# Altium PCB PCB设计_2022-03-27.pcbdoc
Units mil, origin at the board's own origin, x right, y up, seen from the top; angles counter-clockwise.
Board outline 5750.61 x 5202.19 mil, 2 copper layers (Top Layer, Bottom Layer); 62 components, 52 nets, 226 pads, 87 vias.
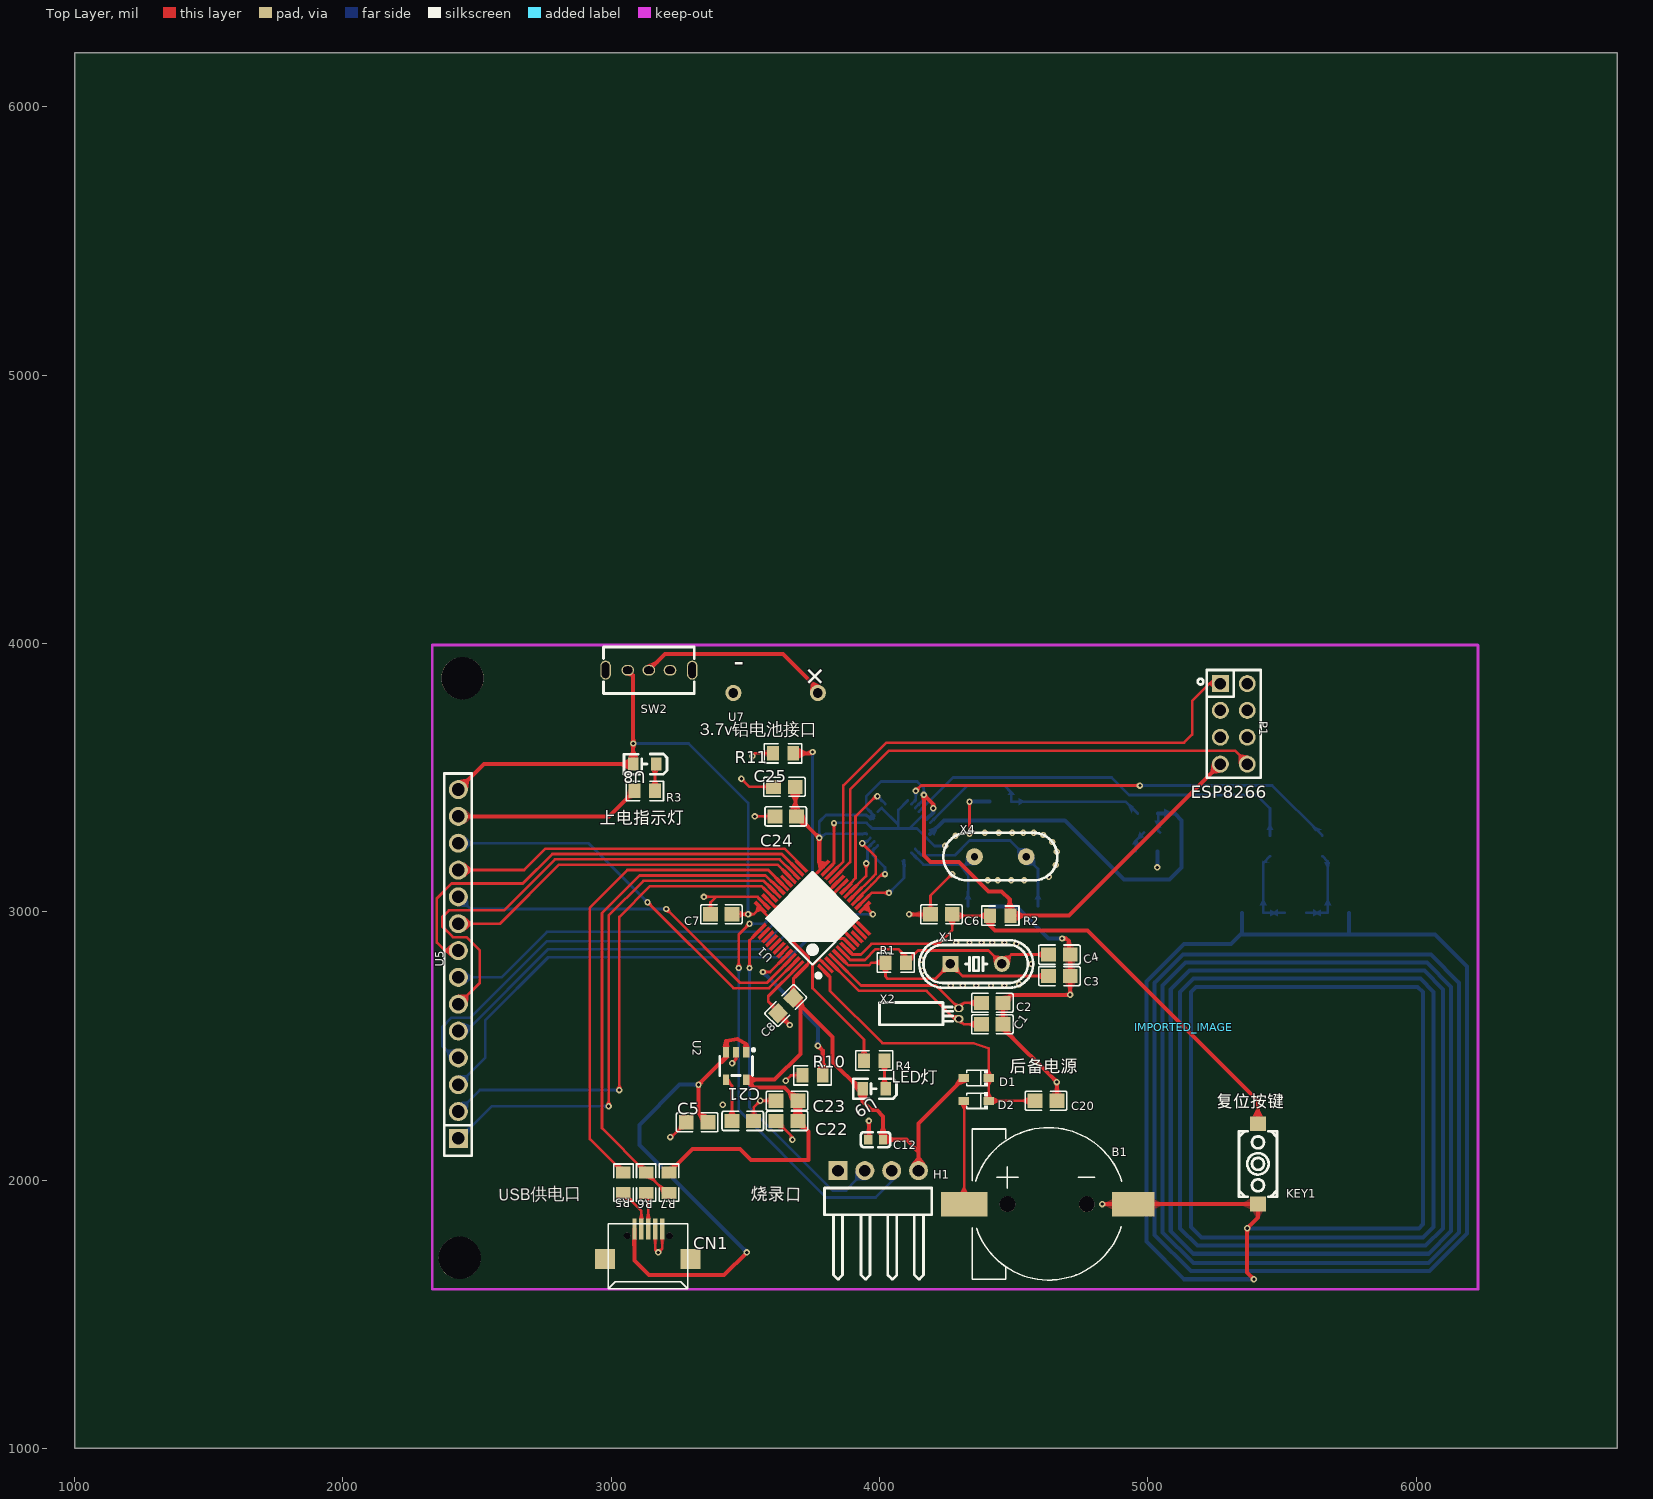
[diagram p0: Top Layer view]
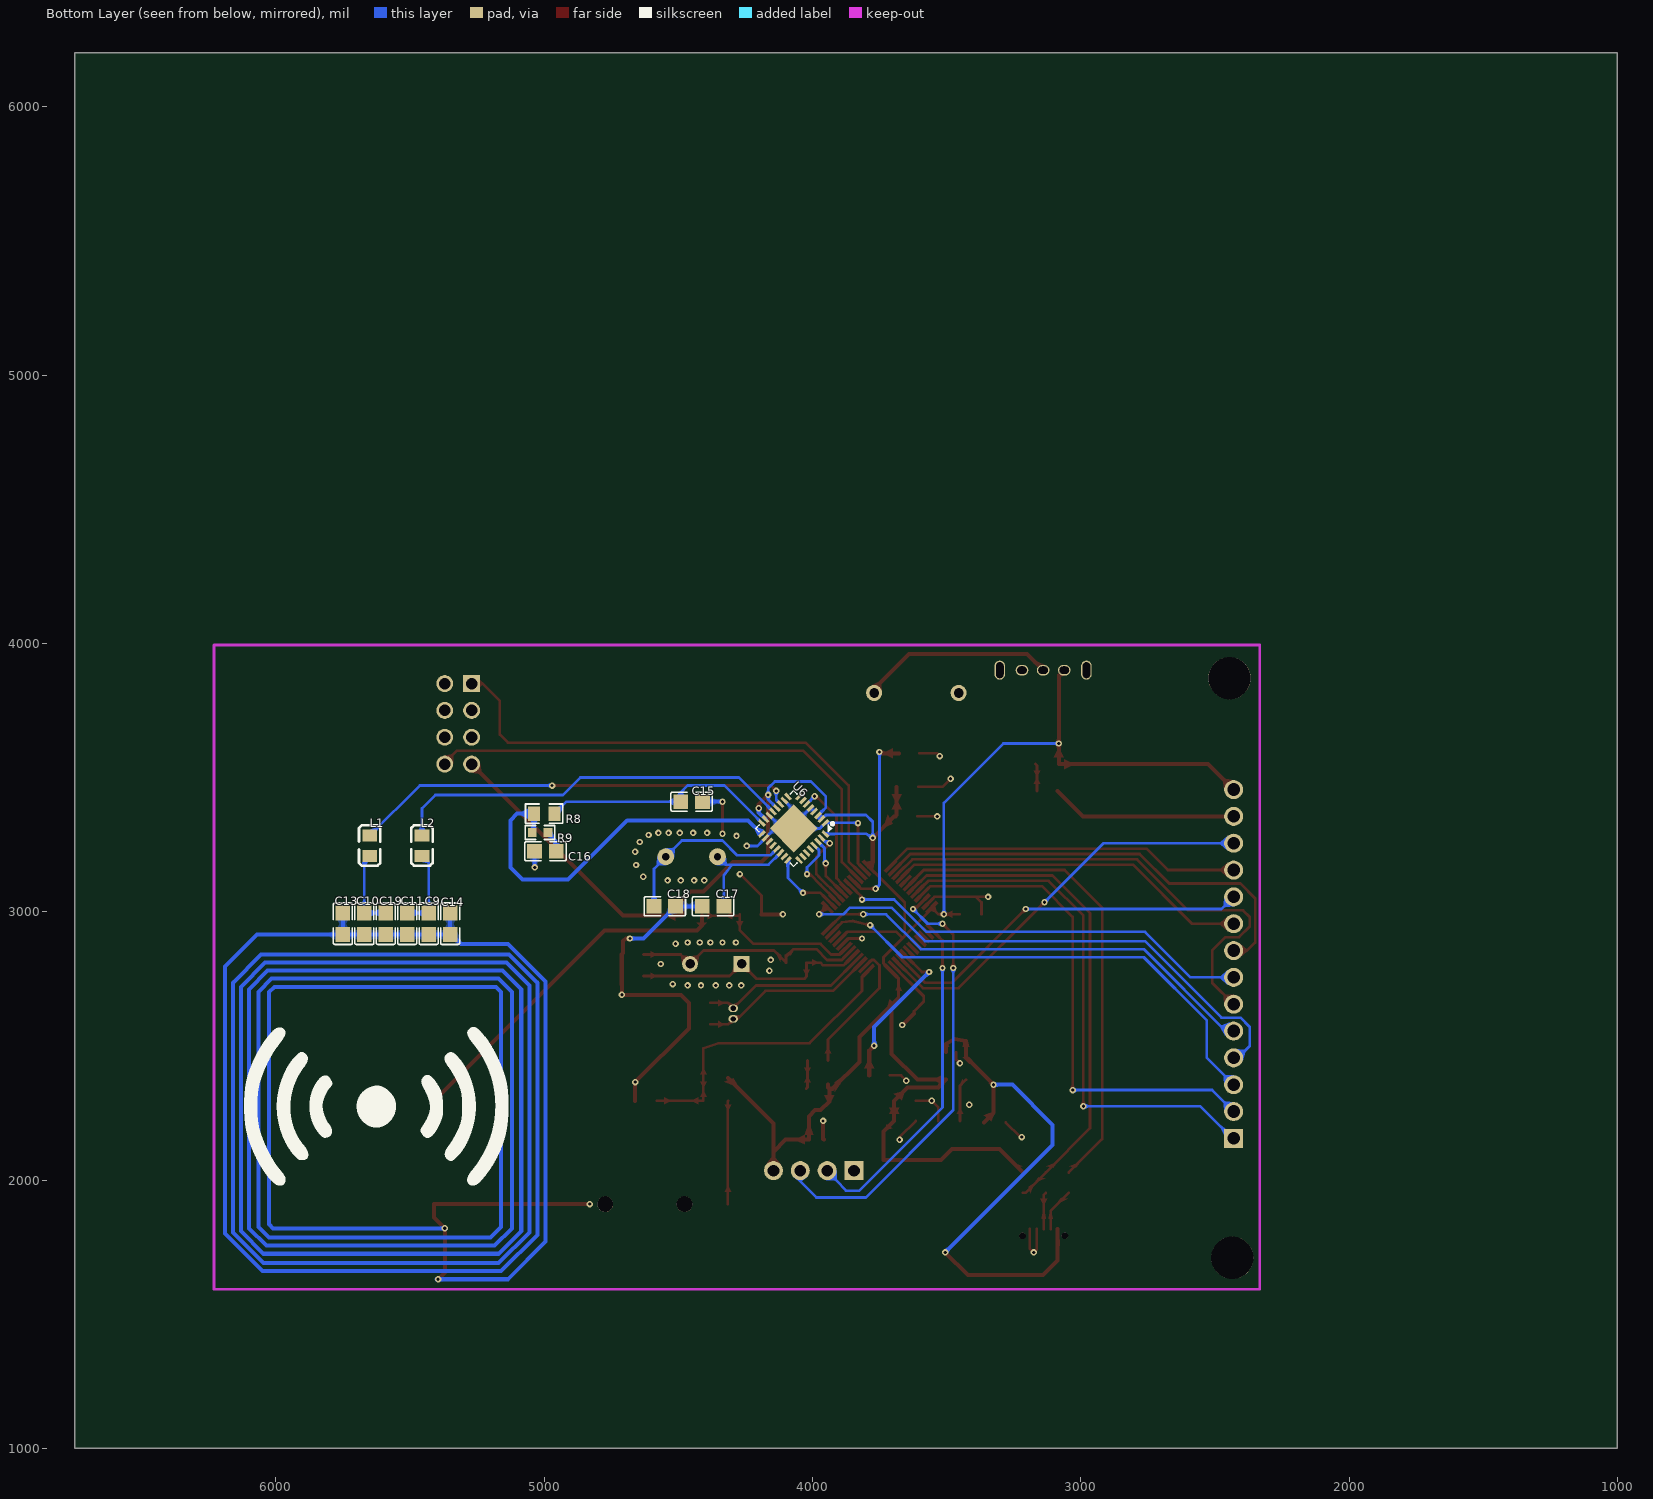
[diagram p1: Bottom Layer view, seen from below]

## Layer stack, top to bottom
Top Layer: signal copper (thickness not stored)
Dielectric: dielectric 12.6, FR-4, Dk 4.8
Bottom Layer: signal copper (thickness not stored)

## Board outline
6750.61,1000 1000,1000 1000,6202.19 6750.61,6202.19

## Components (designator, comment, footprint, x,y, rotation, side; value= is the part's Value field where it differs from the comment)
B1 "CR1220-2" BAT-SMD_CR1220-2 4630.61,1910.19 r0 top
C1 "20pF" C0805#1 4420.61,2580.19 r180 top
C2 "20pF" C0805#1 4420.61,2660.19 r180 top
C3 "20pF" C0805#1 4670.61,2760.19 r180 top
C4 "20pF" C0805#1 4670.61,2840.19 r180 top
C5 "1uF" C0805#1 3320.61,2215.19 r0 top
C6 "1uF" C0805#1 4230.61,2990.19 r0 top
C7 "0.1uF" C0805#1 3410.61,2990.19 r0 top
C8 "0.1uF" C0805#1 3650.61,2650.19 r45 top
C9 "47pF" C0805#2 5430.61,2955.19 r90 bottom
C10 "47pF" C0805#2 5670.61,2955.19 r90 bottom
C11 "47pF" C0805#2 5510.61,2955.19 r270 bottom
C12 "0.1uF" C0603 3985.61,2150.19 r0 top
C13 "120pF" C0805#2 5750.61,2955.19 r90 bottom
C14 "120pF" C0805#2 5350.61,2955.19 r90 bottom
C15 "68nF" C0805#2 4450.61,3410.19 r180 bottom
C16 "68nF" C0805#2 4995.61,3225.19 r0 bottom
C17 "20pF" C0805#2 4370.61,3020.19 r180 bottom
C18 "20pF" C0805#2 4550.61,3020.19 r0 bottom
C19 "47pF" C0805#2 5590.61,2955.19 r270 bottom
C20 "0.1uF" C0805#1 4620.61,2295.19 r180 top
C21 "1uF" C0805#1 3490.61,2220.19 r180 top
C22 "1uF" C0805#1 3655.61,2220.19 r0 top
C23 "1uF" C0805#1 3655.61,2295.19 r0 top
C24 "0.1uF" C0805#1 3650.61,3355.19 r0 top
C25 "0.1uF" C0805#1 3645.61,3465.19 r0 top
CN1 "USB-MK5P(MICRO)" "MICROUSB插座 MK5P 麦克5P MINIUSB MICRO USB母座" 3285.61,1595.19 r0 top
D1 "1N4148WS-C57759" SOD-323_L1.8-W1.3-LS2.5-RD 4360.61,2380.19 r180 top
D2 "1N4148WS-C57759" SOD-323_L1.8-W1.3-LS2.5-RD 4360.61,2295.19 r180 top
H1 "KH-2.54PH90-1X4P-L13.8" HDR-TH_4P-P2.54-H-M-W10.4-N 3995.61,2035.19 r0 top
IMPORTED_IMAGE "IMPORTED_IMAGE" IMPORTED_IMAGE 5133.62,2570.11 r0 top
KEY1 "K2-3.6×6.1_SMD" KEY-SMD_2P-L6.2-W3.6-LS8.0 5410.61,2060.19 r90 top
L1 "2.2uH" L0805 5650.61,3245.19 r90 bottom
L2 "2.2uH" L0805 5455.61,3245.19 r90 bottom
P1 "ESP8266-TH8" HDR-TH_8P-P2.54-V-F-R2-C4-S2.54-1 5320.61,3700.19 r270 top
R1 "1MΩ" R0805#1 4060.61,2810.19 r180 top
R2 "10kΩ" R0805#1 4450.61,2985.19 r0 top
R3 "510Ω" R0805#1 3125.61,3450.19 r0 top
R4 "510Ω" R0805#1 3980.61,2445.19 r0 top
R5 "30Ω" R0805#1 3045.61,1990.19 r270 top
R6 "30Ω" R0805#1 3130.61,1990.19 r270 top
R7 "4.3K" R0805#1 3215.61,1990.19 r270 top
R8 "820Ω" R0805#2 5000.61,3365.19 r180 bottom
R9 "560" R0603 5015.61,3295.19 r0 bottom
R10 "10kΩ" R0805#1 3750.61,2390.19 r0 top
R11 "10kΩ" R0805#1 3640.61,3590.19 r180 top
SW2 "SK-12D02-VG5" SW-TH_SK-12D02VG3 3140.61,3900.19 r180 top
U1 "STM32F103C8T6" LQFP48(STM32F103X8/STM32F103XB) 3750.61,2975.19 r135 top
U2 "RT9193-30GB" SOT-23-5_L3.0-W1.7-P0.95-LS2.8-BR 3465.61,2425.19 r90 top
U5 "KH-2.54FH-1X14P-H8.5" HDR-TH_14P-P2.54-V-F 2430.61,2805.19 r90 top
U6 "MFRC522" QFN-32_L5.0-W5.0-P0.50-TL-EP3.1 4070.61,3310.19 r135 bottom
U7 "3.7v锂电池接口" 3.7V锂电池接口 3770.61,3815.19 r90 top
U8 "发光二极管（黄绿色）" LED0805-RD 3125.61,3550.19 r180 top
U9 "发光二极管（黄绿色）" LED0805-RD 3980.61,2340.19 r180 top
X1 "8MHz" HC-49US_L11.5-W4.5-P4.88 4360.61,2805.19 r0 top
X2 "32.768KHz" OSC-TH_BD2.1-P0.70-D0.3 4295.61,2620.19 r0 top
X4 "27.12MHz" OSC-TH_L10.0-W4.5-P5.00 4450.61,3205.19 r90 top
? "" ? 4283.11,4136.04 r0 top
? "" ? 5086.42,4497.69 r0 top
? "" ? 2247.2,1850.2 r0 top
? "" ? 2183.81,3742.7 r0 top
? "" ? 1916.31,2800.19 r0 top

## Footprints (in the part's own frame and the unit in brackets; to place one, negate y for a bottom-side part, rotate by r counter-clockwise, add the part's x,y. Pads: shape width x height; smd on the part's side, far side on the other; paste and mask are expansions set on the pad)
3.7V锂电池接口 [mil]
  round 60 hole 36: 1(0,0) 2(0,314.96)
BAT-SMD_CR1220-2 [mm]
  rect 4.4x2.3 smd: 1(-8,0)
  rect 4x2.3 smd: 2(8,0)
  round 1.5 hole 1.5 unplated: ""(-3.9,0) ""(3.6,0)
  silkscreen extent -7.22,-7.19 6.92,7.25
C0603 [mm]
  rect 0.8x0.9 smd: 1(-0.7,0) 2(0.7,0)
  silkscreen extent -1.41,-0.71 1.39,0.72
C0805#1 [mm]
  rect 1.41x1.35 smd: 1(-1.03,0) 2(1.03,0)
  silkscreen extent -1.96,-0.9 1.96,0.9
C0805#2 [mm]
  rect 1.41x1.35 smd: 1(1.03,0) 2(-1.03,0)
  silkscreen extent -1.96,-0.9 1.96,0.9
HC-49US_L11.5-W4.5-P4.88 [mm]
  rect 1.5x1.5 hole 0.9: 1(-2.44,0)
  round 1.5 hole 0.9: 2(2.44,0)
  silkscreen extent -5.39,-2.25 5.39,2.25
HDR-TH_4P-P2.54-H-M-W10.4-N [mm]
  rect 1.8x1.8 hole 1.1: 1(-3.81,0)
  round 1.8 hole 1.1: 2(-1.27,0) 3(1.27,0) 4(3.81,0)
  silkscreen extent -5.09,-10.27 5.07,-1.65
HDR-TH_8P-P2.54-V-F-R2-C4-S2.54-1 [mm]
  rect 1.6x1.6 hole 1.1: 1(-3.81,-1.27)
  round 1.6 hole 1.1: 2(-3.81,1.27) 3(-1.27,-1.27) 4(-1.27,1.27) 5(1.27,-1.27) 6(1.27,1.27) 7(3.81,-1.27) 8(3.81,1.27)
  silkscreen extent -5.1,-3.42 5.1,2.55
HDR-TH_14P-P2.54-V-F [mm]
  rect 1.8x1.8 hole 1.2: 1(-16.51,0)
  round 1.8 hole 1.2: 2(-13.97,0) 3(-11.43,0) 4(-8.89,0) 5(-6.35,0) 6(-3.81,0) 7(-1.27,0) 8(1.27,0) 9(3.81,0) 10(6.35,0) 11(8.89,0) 12(11.43,0) 13(13.97,0) 14(16.51,0)
  silkscreen extent -18.16,-1.27 18.03,1.34
IMPORTED_IMAGE [mil]
KEY-SMD_2P-L6.2-W3.6-LS8.0 [mm]
  rect 1.4x1.5 smd: 1(-3.8,0) 2(3.8,0)
  silkscreen extent -3.1,-1.8 3.1,1.8
L0805 [mil]
  rect 44.59x54.21 smd: 1(38.05,0) 2(-38.04,0)
  silkscreen extent -73,-40 77,40
LED0805-RD [mm]
  rect 1x1.25 smd: 1(-1.1,0) 2(1.1,0)
  silkscreen extent -2.1,-0.95 1.98,0.96
LQFP48(STM32F103X8/STM32F103XB) [mil]
  round 0 smd: 1(-166.34,108.27) 2(-166.34,88.58) 3(-166.34,68.9) 4(-166.34,49.21) 5(-166.34,29.53) 6(-166.34,9.84) 7(-166.34,-9.84) 8(-166.34,-29.53) 9(-166.34,-49.21) 10(-166.34,-68.9) 11(-166.34,-88.58) 12(-166.34,-108.27) 13(-108.27,-166.34) 14(-88.58,-166.34) 15(-68.9,-166.34) 16(-49.21,-166.34) 17(-29.53,-166.34) 18(-9.84,-166.34) 19(9.84,-166.34) 20(29.53,-166.34) 21(49.21,-166.34) 22(68.9,-166.34) 23(88.58,-166.34) 24(108.27,-166.34) 25(166.34,-108.27) 26(166.34,-88.58) 27(166.34,-68.9) 28(166.34,-49.21) 29(166.34,-29.53) 30(166.34,-9.84) 31(166.34,9.84) 32(166.34,29.53) 33(166.34,49.21) 34(166.34,68.9) 35(166.34,88.58) 36(166.34,108.27) 37(108.27,166.34) 38(88.58,166.34) 39(68.9,166.34) 40(49.21,166.34) 41(29.53,166.34) 42(9.84,166.34) 43(-9.84,166.34) 44(-29.53,166.34) 45(-49.21,166.34) 46(-68.9,166.34) 47(-88.58,166.34) 48(-108.27,166.34)
  Top Layer region: -114.17,194.88 -102.36,194.88 -102.36,137.8 -114.17,137.79
  Top Layer region: -94.49,194.88 -82.68,194.88 -82.68,137.79 -94.49,137.8
  Top Layer region: -74.8,194.88 -62.99,194.88 -62.99,137.8 -74.8,137.79
  Top Layer region: -55.12,194.88 -43.31,194.88 -43.31,137.79 -55.12,137.79
  Top Layer region: -35.43,194.88 -23.62,194.88 -23.62,137.8 -35.43,137.8
  Top Layer region: -15.75,194.88 -3.94,194.88 -3.94,137.8 -15.75,137.79
  Top Layer region: 3.94,194.88 15.75,194.88 15.75,137.79 3.94,137.8
  Top Layer region: 23.62,194.88 35.43,194.88 35.43,137.8 23.62,137.8
  Top Layer region: 43.31,194.88 55.12,194.88 55.12,137.79 43.31,137.79
  Top Layer region: 62.99,194.88 74.8,194.88 74.8,137.79 62.99,137.8
  Top Layer region: 82.68,194.88 94.49,194.88 94.49,137.8 82.68,137.79
  Top Layer region: 102.36,194.88 114.17,194.88 114.17,137.79 102.36,137.8
  Top Layer region: 137.8,102.36 137.79,114.17 194.88,114.17 194.88,102.36
  Top Layer region: 137.79,82.68 137.8,94.49 194.88,94.49 194.88,82.68
  Top Layer region: 137.8,62.99 137.79,74.8 194.88,74.8 194.88,62.99
  Top Layer region: 137.79,43.31 137.79,55.12 194.88,55.12 194.88,43.31
  Top Layer region: 137.8,23.62 137.8,35.43 194.88,35.43 194.88,23.62
  Top Layer region: 137.8,3.94 137.79,15.75 194.88,15.75 194.88,3.94
  Top Layer region: 137.79,-15.75 137.8,-3.94 194.88,-3.94 194.88,-15.75
  Top Layer region: 137.8,-35.43 137.8,-23.62 194.88,-23.62 194.88,-35.43
  Top Layer region: 137.79,-55.12 137.79,-43.31 194.88,-43.31 194.88,-55.12
  Top Layer region: 137.79,-74.8 137.8,-62.99 194.88,-62.99 194.88,-74.8
  Top Layer region: 137.8,-94.49 137.79,-82.68 194.88,-82.68 194.88,-94.49
  Top Layer region: 137.79,-114.17 137.8,-102.36 194.88,-102.36 194.88,-114.17
  Top Layer region: 102.36,-137.8 114.17,-137.79 114.17,-194.88 102.36,-194.88
  Top Layer region: 82.68,-137.79 94.49,-137.8 94.49,-194.88 82.68,-194.88
  Top Layer region: 62.99,-137.8 74.8,-137.79 74.8,-194.88 62.99,-194.88
  Top Layer region: 43.31,-137.79 55.12,-137.79 55.12,-194.88 43.31,-194.88
  Top Layer region: 23.62,-137.8 35.43,-137.8 35.43,-194.88 23.62,-194.88
  Top Layer region: 3.94,-137.8 15.75,-137.79 15.75,-194.88 3.94,-194.88
  Top Layer region: -15.75,-137.79 -3.94,-137.8 -3.94,-194.88 -15.75,-194.88
  Top Layer region: -35.43,-137.8 -23.62,-137.8 -23.62,-194.88 -35.43,-194.88
  Top Layer region: -55.12,-137.79 -43.31,-137.79 -43.31,-194.88 -55.12,-194.88
  Top Layer region: -74.8,-137.79 -62.99,-137.8 -62.99,-194.88 -74.8,-194.88
  Top Layer region: -94.49,-137.8 -82.68,-137.79 -82.68,-194.88 -94.49,-194.88
  Top Layer region: -114.17,-137.79 -102.36,-137.8 -102.36,-194.88 -114.17,-194.88
  Top Layer region: -194.88,-114.17 -194.88,-102.36 -137.8,-102.36 -137.79,-114.17
  Top Layer region: -194.88,-94.49 -194.88,-82.68 -137.79,-82.68 -137.8,-94.49
  Top Layer region: -194.88,-74.8 -194.88,-62.99 -137.8,-62.99 -137.79,-74.8
  Top Layer region: -194.88,-55.12 -194.88,-43.31 -137.79,-43.31 -137.79,-55.12
  Top Layer region: -194.88,-35.43 -194.88,-23.62 -137.8,-23.62 -137.8,-35.43
  Top Layer region: -194.88,-15.75 -194.88,-3.94 -137.8,-3.94 -137.79,-15.75
  Top Layer region: -194.88,3.94 -194.88,15.75 -137.79,15.75 -137.8,3.94
  Top Layer region: -194.88,23.62 -194.88,35.43 -137.8,35.43 -137.8,23.62
  Top Layer region: -194.88,43.31 -194.88,55.12 -137.79,55.12 -137.79,43.31
  Top Layer region: -194.88,62.99 -194.88,74.8 -137.79,74.8 -137.8,62.99
  Top Layer region: -194.88,82.68 -194.88,94.49 -137.8,94.49 -137.79,82.68
  Top Layer region: -194.88,102.36 -194.88,114.17 -137.79,114.17 -137.8,102.36
  silkscreen extent -171,-122 122,141
"MICROUSB插座 MK5P 麦克5P MINIUSB MICRO USB母座" [mm]
  rect 1.9x1.9 smd: 0(-7.849,2.819) 0(0.254,2.819)
  round 0.6 hole 0.6 slot 0.605 at 45 deg: 0(-5.74,5.004) 0(-1.727,5.004)
  rect 0.4x2 smd: 1(-5.055,5.639) 2(-4.394,5.639) 3(-3.734,5.639) 4(-3.073,5.639) 5(-2.413,5.639)
  silkscreen extent -7.54,0 0,6.15
OSC-TH_BD2.1-P0.70-D0.3 [mm]
  oval 0.9x0.7 hole 0.5: 1(0,0.5) 2(0,-0.5)
  silkscreen extent -7.5,-1.05 -0.57,1.05
OSC-TH_L10.0-W4.5-P5.00 [mm]
  round 1.6 hole 0.7: 1(0,2.45) 2(0,-2.45)
  silkscreen extent -2.25,-5.39 2.25,5.39
QFN-32_L5.0-W5.0-P0.50-TL-EP3.1 [mm]
  rect 0.8x0.3 smd: 1(2.5,-1.75) 2(2.5,-1.25) 3(2.5,-0.75) 4(2.5,-0.25) 5(2.5,0.25) 6(2.5,0.75) 7(2.5,1.25) 8(2.5,1.75) 17(-2.5,1.75) 18(-2.5,1.25) 19(-2.5,0.75) 20(-2.5,0.25) 21(-2.5,-0.25) 22(-2.5,-0.75) 23(-2.5,-1.25) 24(-2.5,-1.75)
  rect 0.3x0.8 smd: 9(1.75,2.5) 10(1.25,2.5) 11(0.75,2.5) 12(0.25,2.5) 13(-0.25,2.5) 14(-0.75,2.5) 15(-1.25,2.5) 16(-1.75,2.5) 25(-1.75,-2.5) 26(-1.25,-2.5) 27(-0.75,-2.5) 28(-0.25,-2.5) 29(0.25,-2.5) 30(0.75,-2.5) 31(1.25,-2.5) 32(1.75,-2.5)
  rect 3.2x3.2 smd: 33(0,0)
  silkscreen extent -2.54,-2.54 3.05,2.54
R0603 [mil]
  rect 31.75x34.02 smd: 1(29.65,0) 2(-29.65,0)
  silkscreen extent -55,-26 55,26
R0805#1 [mil]
  rect 44.59x54.21 smd: 1(-38.04,0) 2(38.04,0)
  silkscreen extent -69,-36 69,36
R0805#2 [mil]
  rect 44.59x54.21 smd: 1(38.04,0) 2(-38.04,0)
  silkscreen extent -69,-36 69,36
SOD-323_L1.8-W1.3-LS2.5-RD [mm]
  rect 1x0.75 smd: 1(-1.173,0) 2(1.173,0)
  silkscreen extent -1.08,-0.8 0.9,0.8
SOT-23-5_L3.0-W1.7-P0.95-LS2.8-BR [mm]
  rect 1x0.6 smd: 1(1.3,-0.95) 2(1.3,0) 3(1.3,0.95) 4(-1.3,0.95) 5(-1.3,-0.95)
  silkscreen extent -0.9,-1.78 1.65,1.55
SW-TH_SK-12D02VG3 [mm]
  oval 1.2x1 hole 0.7 slot 0.9 at 0 deg: 1(-2,0) 2(0,0) 3(2,0)
  oval 1x1.8 hole 0.7 slot 1.5 at 90 deg: 4(4.1,0) 5(-4.1,0)
  silkscreen extent -4.3,-2.2 4.3,2.2
? [mil]

## Free pads (board coordinates)
  round 157.48 hole 157.48: 1(2445.61,3870.19) 2(2435.61,1710.19)

## Via types
v1: diameter 24, hole 12, Top Layer to Bottom Layer, 87 vias

## Nets (pads, with @x,y where several pads share a name; then routed paths per layer and width w, separated by ;. In a path a pad name is that pad's centre, name@x,y a point inside that pad or via, vN(x,y) a via of type N, cw(c..) or ccw(c..) an arc to the next point about the centre after c; other vN are vias at no path point)
+5V: C5.2 CN1.1 U2.1 U2.3 | length 1988.4
  Top Layer w15: CN1.1 3086.61,1699.19 3140.61,1645.19 3420.61,1645.19 v1(3505.61,1730.19) ; C5.2@3361.11,2215.19 3325.61,2250.69 v1(3325.61,2355.19) 3428.21,2457.79 U2.3 3428.21,2517.79 3470.61,2525.19 3503.01,2507.79 U2.1
  Bottom Layer w15: v1(3325.61,2355.19) 3255.61,2355.19 3105.61,2205.19 3105.61,2130.19 v1(3505.61,1730.19)
B1_1: B1.1 D2.2 | length 385.5
  Top Layer w10: D2.2 4315.61,2293.99 B1.1@4315.61,1910.19
C9_1: C9.1 C11.2 L2.2 | length 301.9
  Bottom Layer w10: L2.2 5430.61,3182.19 C9.1 C11.2@5510.61,2995.79
C16_2: C16.2 R9.2 | length 82.8
  Bottom Layer w10: C16.2@4955.01,3225.19 4955.01,3264.29 R9.2@4985.91,3295.19
C19_2: C10.1 C19.2 L1.2 | length 299.8
  Bottom Layer w10: C19.2@5590.61,2995.79 C10.1 5670.61,3187.19 L1.2
GND: B1.2 C1.1 C2.1 C3.1 C4.1 C5.1 C6.1 C7.1 C8.1 C9.2 C10.2 C11.1 C12.1 C13.1 C13.2 C14.1 C14.2 C15.1 C16.1 C17.2 C18.2 C19.1 C20.1 C21.1 C22.1 C23.1 C24.1 C25.1 CN1.4 CN1.5 H1.1 KEY1.1 P1.2 R3.1 R10.1 R11.2 U1.8 U1.23 U1.35 U1.47 U2.2 U5.13 U6.1 U6.4 U6.5 U6.10 U6.14 U6.18 U6.33 U7.2 | length 30456.9
  Top Layer w10: CN1.4 3164.61,1741.19 v1(3175.61,1730.19) 3190.61,1745.19 CN1.5 ; v1(3220.61,2160.19) 3225.11,2160.19 C5.1 ; v1(3345.61,3055.19) 3390.61,3055.19 ; C7.1 3370.11,3034.69 3390.61,3055.19 ; v1(3450.61,2435.19) 3465.61,2450.19 U2.2 ; v1(3485.61,3495.19) 3515.61,3465.19 C25.1@3605.01,3465.19 ; v1(3525.61,3580.19) 3535.61,3590.19 R11.2 ; C21.1@3531.11,2220.19 3531.11,2270.69 v1(3555.61,2295.19) C23.1@3615.01,2295.19 ; v1(3535.61,3355.19) C24.1@3610.01,3355.19 ; U1.35 3545.31,3055.19 3390.61,3055.19 ; C22.1@3615.01,2220.19 3675.61,2159.69 v1(3675.61,2150.19) ; C8.1 3621.91,2628.89 3585.61,2665.19 3585.61,2684.89 U1.47 ; v1(3650.61,2370.19) 3670.61,2390.19 R10.1 ; 3805.61,3155.49 3830.61,3180.49 v1(3830.61,3330.19) ; v1(3815.61,2900.19) 3867.41,2900.19 U1.8 ; C6.1@4190.01,2990.19 4190.01,3059.69 v1(4270.61,3140.19) ; v1(4335.61,3290.19) v1(4335.61,3410.19)
  Top Layer w15: U5.13 2992.61,3355.19 R3.1 ; C8.1 v1(3665.61,2577.85) v1@3665.61,2575.19 ; C12.1@3958.01,2150.19 3960.61,2152.79 v1(3960.61,2220.19) ; v1(4110.61,2990.19) C6.1 ; C1.1@4461.11,2580.19 4461.11,2660.19 4491.11,2690.19 v1(4710.61,2690.19) 4711.11,2760.19 4711.11,2840.19 4705.61,2845.69 4705.61,2890.19 4695.61,2900.19 v1(4680.61,2900.19) ; C1.1 4461.21,2565.19 v1(4661.16,2365.19) C20.1 ; v1(4830.61,1910.19) B1.2 KEY1.1 5410.61,1860.19 v1(5370.61,1820.19) 5370.61,1655.19 v1(5395.61,1630.19)
  Bottom Layer w10: v1(3830.61,3330.19) 3831.51,3331.09 U6.1 3973.21,3310.19 U6.33 ; U6.4@3994.01,3372.79 4008.01,3386.79 4070.61,3324.09 U6.33 ; U6.10 4070.61,3379.79 U6.33 ; U6.14 4112.41,3310.19 U6.33 ; v1(4245.61,3245.19) 4205.21,3245.19 U6.18 4140.21,3310.19 U6.33
  Bottom Layer w15: v1(4335.61,3410.19) C15.1 ; C17.2 4510.01,3020.19 4630.01,2900.19 v1(4680.61,2900.19) ; v1(5035.61,3165.19) C16.1@5036.11,3225.19 ; C14.2@5350.61,2914.69 5345.01,2914.69 5310.61,2880.19 5135.61,2880.19 4995.61,2740.19 4995.61,1770.19 5135.61,1630.19 v1(5395.61,1630.19) v1@5400.61,1630.19 ; C14.1 C14.2 C9.2 5510.61,2914.69 5590.61,2914.69 C10.2 C13.2 C13.1 ; v1@5365.61,1820.19 v1(5370.61,1820.19) 6010.61,1820.19 6025.61,1835.19 6025.61,2700.19 6005.61,2720.19 5180.61,2720.19 5160.61,2700.19 5160.61,1825.19 5200.61,1785.19 6025.61,1785.19 6065.61,1825.19 6065.61,2700.19 6015.61,2750.19 5170.61,2750.19 5120.61,2700.19 5120.61,1820.19 5185.61,1755.19 6035.61,1755.19 6100.61,1820.19 6100.61,2710.19 6030.61,2780.19 5155.61,2780.19 5085.61,2710.19 5085.61,1810.19 5170.61,1725.19 6045.61,1725.19 6130.61,1810.19 6130.61,2720.19 6040.61,2810.19 5140.61,2810.19 5055.61,2725.19 5055.61,1805.19 5170.61,1690.19 6045.61,1690.19 6160.61,1805.19 6160.61,2735.19 6055.61,2840.19 5130.61,2840.19 5025.61,2735.19 5025.61,1795.19 5160.61,1660.19 6050.61,1660.19 6190.61,1800.19 6190.61,2795.19 6071.21,2914.69 C13.2@5750.61,2914.69
  other v1: 3415.61,2280.19 4265.61,2725.19 4310.61,2725.19 4360.61,2725.19 4415.61,2725.19 4465.61,2725.19 4520.61,2730.19 4160.61,2780.19 4565.61,2805.19 4155.61,2820.19 4510.61,2880.19 4285.61,2885.19 4335.61,2885.19 4380.61,2885.19 4420.61,2885.19 4465.61,2885.19 4403.74,3116.69 4441.6,3116.69 4490.88,3116.69 4540.17,3116.69 4630.61,3130.19 4657.49,3174.14 4661.17,3223.63 4644.21,3259.86 4283.43,3282.44 4611.05,3285.84 4393.03,3293.69 4445.17,3293.69 4495.17,3293.69 4536.6,3293.69 4574.61,3293.69
MISO: U1.16 U6.31 | length 291.5
  Top Layer w10: U1.16 3975.21,3130.19 ; v1(3935.61,3255.19) 3985.61,3205.19 3985.61,3140.6 3975.21,3130.19 ; 3975.61,3130.19 3975.21,3130.19
  Bottom Layer w10: v1(3935.61,3255.19) 3946.01,3255.19 U6.31
MOSI: U1.17 U6.30 | length 230.2
  Top Layer w10: U1.17 3950.61,3133.39 v1(3950.61,3180.19)
  Bottom Layer w10: v1(3950.61,3180.19) 3955.61,3180.19 3955.61,3236.99 U6.30
NSS: U1.14 U6.24 | length 266.1
  Top Layer w10: U1.14 3970.91,3070.19 v1(4035.61,3070.19)
  Bottom Layer w10: v1(4035.61,3070.19) 4091.51,3126.09 U6.24
OSCIN: C3.2 R1.2 U1.5 X1.1 | length 898.7
  Top Layer w10: 3847.31,2836.69 3883.81,2800.19 3960.61,2800.19 3970.61,2810.19 R1.2 4022.61,2758.19 4030.61,2750.19 4209.51,2750.19 X1.1 4309.51,2760.19 C3.2@4630.01,2760.19
OSCOUT: C4.2 R1.1 U1.6 X1.2 | length 885.3
  Top Layer w10: U1.6 3891.71,2820.19 3945.61,2820.19 3985.61,2860.19 4070.61,2860.19 4098.61,2832.19 4098.61,2810.19 4143.61,2855.19 4406.71,2855.19 X1.2 4491.71,2840.19 C4.2@4630.01,2840.19
PA9: R5.1 U1.30 | length 1839.7
  Top Layer w10: R5.1 2920.61,2153.19 2920.61,3015.19 3060.61,3155.19 3585.61,3155.19 3639.91,3100.89 3639.91,3099.79
PA10: R6.1 R7.2 U1.31 | length 1888.3
  Top Layer w10: R7.2 3206.71,1952.19 R6.1 2965.61,2193.19 2965.61,2995.19 3105.61,3135.19 3575.61,3135.19 3620.61,3090.19 3625.51,3090.19
PB10: P1.1 U1.22 | length 1983.4
  Top Layer w10: U1.22 3865.61,3187.59 3865.61,3470.19 4025.61,3630.19 5135.61,3630.19 5165.61,3660.19 5165.61,3785.19 5230.61,3850.19 P1.1
PB11: P1.8 U1.21 | length 1915
  Top Layer w10: U1.21 3890.61,3184.79 3890.61,3455.19 4035.61,3600.19 5325.61,3600.19 5370.61,3555.19 P1.8
PC13: R4.1 U1.2 | length 508.3
  Top Layer w10: U1.2 3780.31,2820.19 3770.61,2820.19 3750.61,2800.19 3750.61,2715.19 3942.61,2523.19 R4.1
PC14: C1.2 U1.3 X2.2 | length 655.2
  Top Layer w10: U1.3 3923.21,2705.19 4175.61,2705.19 4280.31,2600.49 X2.2 4315.91,2580.19 C1.2@4380.01,2580.19
PC15: C2.2 U1.4 X2.1 | length 630.9
  Top Layer w10: U1.4 3931.01,2725.19 4210.61,2725.19 X2.1 4315.91,2660.19 C2.2@4380.01,2660.19
R3_2: R3.2 U8.1 | length 102.2
  Top Layer w10: R3.2@3163.61,3450.19 3163.61,3544.89 U8.1
R4_2: R4.2 U9.1 | length 107.2
  Top Layer w10: R4.2@4018.61,2445.19 4018.61,2345.49 U9.1
R5_2: CN1.2 R5.2 | length 162.8
  Top Layer w10: R5.2 3112.61,1885.19 CN1.2
R6_2: CN1.3 R6.2 | length 138.3
  Top Layer w10: R6.2 3138.61,1944.19 CN1.3
RESET: C6.2 KEY1.2 R2.1 U1.7 | length 2037.3
  Top Layer w10: U1.7 3899.51,2840.19 3930.61,2840.19 3970.61,2880.19 4220.61,2880.19 4271.21,2930.79 C6.2 4276.21,2985.19 R2.1
  Top Layer w15: R2.1 4412.61,2948.19 4430.61,2930.19 4775.61,2930.19 5410.61,2295.19 KEY1.2
RST: U1.18 U6.6 | length 432.5
  Top Layer w10: U1.18 3910.61,3125.19 3910.61,3355.19 v1@3985.61,3430.19
  Bottom Layer w10: v1@3990.61,3430.19 v1(3992.37,3430.19) U6.6
S$164: 
SCK: U1.15 U6.29 | length 278.8
  Top Layer w10: 3916.91,3044.09 3916.91,3046.49 3970.61,3100.19 4010.11,3140.19 v1(4020.61,3140.19)
  Bottom Layer w10: U6.29 3975.61,3229.09 3975.61,3210.19 4020.61,3165.19 v1(4020.61,3140.19)
SW2_2: SW2.2 U7.1 | length 723.7
  Top Layer w15: SW2.2 3200.61,3960.19 3640.61,3960.19 3770.61,3830.19 U7.1
SWDCLK: H1.2 U1.37 | length 1271.8
  Top Layer w10: v1(3515.61,2790.19) 3515.61,2893.29 U1.37
  Bottom Layer w10: v1(3515.61,2790.19) 3515.61,2270.19 3825.61,1960.19 3875.61,1960.19 H1.2
SWDIO: H1.3 U1.34 | length 1669.2
  Top Layer w10: v1(3475.61,2790.19) 3475.61,2915.19 v1(3515.61,2955.19) ; U1.34 3618.21,3010.19 v1(3625.61,3010.19)
  Bottom Layer w10: v1(3475.61,2790.19) 3475.61,2260.19 3800.61,1935.19 3985.61,1935.19 4045.61,1995.19 H1.3 ; v1(3515.61,2955.19) 3570.61,2955.19 v1(3625.61,3010.19)
T_CLK: U1.12 U5.5 | length 1717.6
  Top Layer w10: v1(3810.61,2990.19) 3888.71,2990.19 U1.12
  Bottom Layer w10: U5.5 2460.61,2555.19 2765.61,2860.19 3595.61,2860.19 3725.61,2990.19 v1(3810.61,2990.19)
T_CS: U1.13 U5.4 | length 1989.9
  Top Layer w10: U1.13 3949.51,3016.29 v1(3975.61,2990.19)
  Bottom Layer w10: U5.4 2415.61,2455.19 2370.61,2500.19 2370.61,2570.19 2405.61,2605.19 2475.61,2605.19 2760.61,2890.19 3580.61,2890.19 3705.61,3015.19 3860.61,3015.19 3885.61,2990.19 v1(3975.61,2990.19)
T_DIN: U1.11 U5.3 | length 1847.4
  Top Layer w10: v1(3785.61,2950.19) 3850.61,2965.19 3890.91,2960.19 U1.11
  Bottom Layer w10: U5.3 2530.61,2455.19 2530.61,2595.19 2765.61,2830.19 3665.61,2830.19 v1(3785.61,2950.19)
T_DO: U1.33 U5.2 | length 1908.8
  Top Layer w10: v1(3030.61,2335.19) 3030.61,2980.19 3145.61,3095.19 3561.01,3095.19 U1.33
  Bottom Layer w10: U5.2 2510.61,2335.19 v1(3030.61,2335.19)
T_IRQ: U1.32 U5.1 | length 2013
  Top Layer w10: v1(2990.61,2275.19) 2990.61,2985.19 3120.61,3115.19 3568.81,3115.19 U1.32
  Bottom Layer w10: U5.1 2435.61,2155.19 2555.61,2275.19 v1(2990.61,2275.19)
TFT_CS: U1.46 U5.12 | length 1513.6
  Top Layer w10: v1(3135.61,3035.19) 3455.61,2715.19 3588.01,2715.19 U1.46
  Bottom Layer w10: U5.12 2915.61,3255.19 v1(3135.61,3035.19)
TFT_DC/RS: U1.45 U5.10 | length 1406
  Top Layer w10: v1(3205.61,3010.19) 3480.61,2735.19 3580.21,2735.19 U1.45
  Bottom Layer w10: U5.10 2475.61,3010.19 v1(3205.61,3010.19)
TFT_LED: U1.19 U5.7 | length 1578.7
  Top Layer w10: v1(3815.61,3045.19) 3815.61,3054.09 U1.19
  Bottom Layer w10: U5.7 2590.61,2755.19 2760.61,2925.19 3575.61,2925.19 3695.61,3045.19 v1(3815.61,3045.19)
TFT_MISO: U1.27 U5.6 | length 1867.8
  Top Layer w10: U5.6 2510.61,2735.19 2510.61,2855.19 2460.61,2905.19 2410.61,2905.19 2370.61,2945.19 2370.61,2980.19 2395.61,3005.19 2600.61,3005.19 2790.61,3195.19 3628.01,3195.19 U1.27
TFT_MOSI: U1.28 U5.9 | length 1348
  Top Layer w10: U5.9 2585.61,2955.19 2805.61,3175.19 3620.21,3175.19 U1.28
TFT_RESET: U1.25 U5.11 | length 1340.1
  Top Layer w10: U5.11 2675.61,3155.19 2755.61,3235.19 3645.61,3235.19 3710.61,3170.19
TFT_SCK: U1.26 U5.8 | length 1695.5
  Top Layer w10: U5.8 2380.61,2855.19 2350.61,2885.19 2350.61,3050.19 2405.61,3105.19 2670.61,3105.19 2780.61,3215.19 3635.91,3215.19 3695.61,3155.49
U1_20: R11.1 U1.20 | length 683.4
  Top Layer w10: v1(3765.07,3085.71) 3819.41,3085.69 3847.31,3113.69
  Top Layer w15: R11.1@3678.61,3590.19 3745.61,3590.19 v1(3750.61,3595.19)
  Bottom Layer w10: v1(3750.61,3595.19) 3750.61,3100.18 v1(3765.07,3085.71)
U1_44: R10.2 U1.44 | length 591.1
  Top Layer w10: v1(3565.61,2775.19) 3592.41,2775.19 U1.44
  Top Layer w15: v1(3770.61,2500.19) 3788.61,2482.19 R10.2@3788.61,2390.19
  Bottom Layer w15: v1(3565.61,2775.19) 3770.61,2570.19 v1(3770.61,2500.19)
U2_4: C21.2 U2.4 | length 162.9
  Top Layer w10: U2.4 3450.11,2352.19 C21.2
U6_11: L1.1 U6.11 | length 1652
  Top Layer w10: v1(4135.61,3450.19) 4155.61,3470.19 v1@4965.61,3470.19
  Bottom Layer w10: U6.11 4135.61,3416.99 v1(4135.61,3450.19) ; v1(4970.61,3470.19) 5463.61,3470.19 L1.1
U6_13: L2.1 U6.13 | length 1510.8
  Bottom Layer w10: U6.13 4274.51,3500.19 4865.61,3500.19 4930.61,3435.19 5405.61,3435.19 5455.61,3385.19 L2.1
U6_16: C15.2 R8.1 U6.16 | length 895
  Bottom Layer w10: U6.16 4328.01,3470.19 4465.61,3470.19 4491.21,3444.59 C15.2 4917.61,3410.19 R8.1
U6_17: R8.2 R9.1 U6.17 | length 1416.5
  Bottom Layer w10: R8.2@5038.61,3365.19 5038.61,3301.79 R9.1
  Bottom Layer w15: U6.17 4239.81,3340.19 4690.61,3340.19 4910.61,3120.19 ; 4914.41,3120.19 4910.61,3120.19 ; R8.2@5038.61,3365.19 5100.61,3365.19 5125.61,3340.19 5125.61,3165.19 5080.61,3120.19 4910.61,3120.19
U6_21: C18.1 U6.21 X4.2 | length 674.5
  Bottom Layer w10: U6.21 4156.71,3210.19 4280.61,3210.19 4335.61,3265.19 4487.11,3265.19 X4.2 4547.11,3203.69 4591.21,3159.69 C18.1
U6_22: C17.1 U6.22 X4.1 | length 431.1
  Bottom Layer w10: U6.22 4163.81,3175.19 4324.11,3175.19 X4.1@4354.11,3205.19 ; 4299.81,3175.19 4330.61,3135.19 C17.1@4330.01,3020.19
VBAT: C20.2 D1.1 D2.1 U1.1 | length 1130.2
  Top Layer w10: U1.1 3815.61,2757.19 3815.61,2705.19 4010.61,2510.19 4350.61,2510.19 4406.81,2491.39 D1.1 D2.1 C20.2@4580.01,2295.19
VCC: C7.2 C8.2 C12.2 C22.2 C23.2 C24.2 C25.2 D1.2 H1.4 P1.7 R2.2 R7.1 SW2.3 U1.9 U1.24 U1.36 U1.48 U2.5 U5.14 U6.2 U6.3 U6.12 U6.15 U6.32 U8.2 U9.2 | length 8983.3
  Top Layer w10: C7.2 v1(3510.33,2990.19) 3530.41,2990.19 U1.36 3556.41,3009.39 3735.61,2830.19 3735.61,2807.09 3709.51,2780.99 3679.31,2750.79 C8.2 ; 3656.41,2909.39 3656.41,3034.09 U1.24 ; 3664.15,2901.65 3687.69,2925.19 3835.61,2925.19 3870.21,2925.19 U1.9
  Top Layer w15: U5.14 2525.61,3550.19 U8.2 v1(3082.3,3626.86) 3082.31,3879.79 SW2.3 ; R7.1 3302.61,2115.19 3480.61,2115.19 3520.61,2075.19 3735.61,2075.19 3735.61,2180.69 C22.2 C23.2 3645.61,2345.19 3531.81,2345.19 U2.5 3609.41,2373.99 3705.61,2470.19 3705.61,2652.49 C8.2 3825.61,2532.59 3825.61,2440.19 3925.61,2340.19 U9.2 ; C25.2 3686.21,3360.19 C24.2 3695.61,3355.19 v1(3775.61,3275.19) 3775.61,3185.39 U1.24 ; U9.2@3942.31,2355.19 3942.31,2345.19 U9.2 ; v1(4200.61,3385.19) 4200.61,3400.19 v1(4165.61,3435.19) 4165.61,3210.19 4190.61,3185.19 4295.61,3185.19 4405.61,3075.19 4455.61,3075.19 4485.61,3045.19 4485.61,2988.19 4488.61,2985.19 4705.61,2985.19 P1.7 ; D1.2 4145.61,2211.39 H1.4 4145.61,2105.19 4100.61,2150.19 C12.2 4013.21,2237.59 3990.61,2260.19 3970.61,2260.19 3937.31,2293.49 U9.2
  Bottom Layer w10: v1(3082.3,3626.86) 3288.91,3626.89 3510.61,3405.19 v1(3510.33,2990.19) ; U6.32 3800.61,3290.19 v1(3775.61,3275.19) 3775.61,3335.19 3800.61,3360.19 3951.01,3360.19 U6.2 U6.3 3950.61,3388.39 3950.61,3430.19 4005.61,3485.19 4140.61,3485.19 4165.61,3460.19 4165.61,3419.09 U6.12@4133.21,3386.79
  Bottom Layer w15: U6.15 4200.61,3370.59 v1(4200.61,3385.19)
pads on no net: B1. CN1.0 P1.3 P1.4 P1.5 P1.6 SW2.1 SW2.4 SW2.5 U1.10 U1.29 U1.38 U1.39 U1.40 U1.41 U1.42 U1.43 U6.7 U6.8 U6.9 U6.19 U6.20 U6.23 U6.25 U6.26 U6.27 U6.28

## Polygon pours and split planes (outlines as drawn)
GND on Bottom Layer (solid): 2320.61,4005.19 6245.61,4005.19 6245.61,3080.19 6250.61,3075.19 4940.61,3075.19 4940.61,1575.19 2315.61,1575.19
GND on Top Layer (solid): 2325.61,4005.19 6235.61,4005.19 6240.61,4010.19 6240.61,1865.19 5205.61,1865.19 5205.61,1575.19 2315.61,1575.19

## Other copper
Top Layer:
  region net VCC: 3714.91,2268.62 3677.41,2268.62 3688.66,2246.12 3703.66,2246.12
  region net VCC: 3677.41,2246.77 3714.91,2246.77 3703.66,2269.27 3688.66,2269.27
  region net VCC: 3668.41,2296.88 3696.45,2321.77 3671.61,2329.8 3660.37,2319.83
  region net VCC: 3514.82,2391.42 3509.34,2354.32 3529.51,2336.91 3532.24,2355.39
  region net VCC: 3514.82,2392.74 3514.82,2355.24 3537.32,2366.49 3537.32,2381.49
  region net VCC: 3711.33,2673.33 3684.81,2646.81 3700.31,2647.23 3710.92,2657.83
  region net R4_2: 4031.11,2418.09 4006.11,2418.09 4013.61,2403.09 4023.61,2403.09
  region net R4_2: 4006.11,2364.79 4031.11,2364.79 4023.61,2379.79 4013.61,2379.79
  region net VCC: 3956.05,2315.59 3918.55,2315.59 3929.8,2293.5 3944.8,2293.5
  region net VCC: 3997.42,2167.91 4028.92,2167.91 4020.71,2190.41 4005.71,2190.41
  region net VCC: 3917.61,2329.44 3917.61,2364.79 3895.11,2381.3 3895.11,2360.08
  region net VCC: 3711.36,2673.36 3684.84,2646.84 3708.71,2638.89 3719.32,2649.5
  region net R3_2: 3151.11,3477.3 3176.11,3477.3 3168.61,3492.3 3158.61,3492.3
  region net R3_2: 3176.11,3525.58 3151.11,3525.58 3158.61,3510.58 3168.61,3510.58
  region net VCC: 3063.55,3574.79 3101.05,3574.79 3089.8,3597.29 3074.8,3597.29
  region net VCC: 3073.3,3618.92 3091.3,3618.92 3089.8,3610.52 3074.8,3610.52
  region net VCC: 3062.62,3531.44 3062.62,3568.94 3040.12,3557.69 3040.12,3542.69
  region net VCC: 2428.39,3490.56 2465.98,3452.97 2470.03,3484 2459.42,3494.61
  region net VCC: 3776.36,3287.17 3763.64,3274.44 3758.76,3281.44 3769.36,3292.05
  region net VCC: 3718.92,3361.77 3701.39,3328.62 3721.56,3318.64 3728.9,3332.51
  region net PC14: 4291.04,2614.27 4281.58,2591.13 4270.37,2603.36 4274.48,2613.4
  region net PC14: 4299.55,2586.72 4291.68,2586.72 4310.4,2578.63 4319.45,2583.73
  region net PC15: 4291.68,2653.65 4299.55,2653.65 4319.45,2656.66 4310.4,2661.75
  region net PC15: 4291.68,2653.65 4299.55,2653.65 4279.62,2663.02 4268.56,2659.95
  region net VCC: 3065.86,3880.51 3057.99,3880.51 3075.04,3876.46 3087.61,3885.09
  region net SW2_2: 3136.67,3919.88 3144.54,3919.88 3175.03,3924.01 3160.5,3930.69
  region net VBAT: 3816.03,2765.01 3807.68,2756.66 3812.08,2753.66 3819.14,2760.73
  region net PC13: 3781.24,2810.94 3789.59,2819.3 3783.85,2823.73 3776.78,2816.66
  region net PC14: 3843.87,2792.85 3835.52,2784.5 3846.79,2774.55 3853.86,2781.62
  region net PC15: 3857.79,2806.77 3849.44,2798.41 3860.69,2788.45 3867.76,2795.52
  region net OSCIN: 3871.71,2820.69 3863.36,2812.34 3874.58,2802.35 3881.66,2809.42
  region net OSCOUT: 3885.63,2834.61 3877.28,2826.25 3888.17,2816.66 3895.25,2823.73
  region net RESET: 3899.55,2848.52 3891.2,2840.17 3895.98,2836.66 3903.05,2843.73
  region net VCC: 3878.67,2908.38 3887.02,2916.73 3875.78,2926.7 3868.71,2919.63
  region net T_DIN: 3906.51,2936.22 3914.86,2944.57 3903.63,2954.55 3896.56,2947.48
  region net T_CLK: 3920.43,2950.14 3928.78,2958.49 3917.53,2968.45 3910.46,2961.38
  region net T_CS: 3960.18,3023.3 3942.51,3005.62 3958.42,3000.32 3965.49,3007.39
  region net NSS: 3946.88,3054.53 3955.23,3046.18 3965.2,3057.42 3958.13,3064.49
  region net MISO: 3919.03,3082.37 3927.39,3074.02 3937.36,3085.27 3930.29,3092.34
  region net MOSI: 3905.12,3096.29 3913.47,3087.94 3923.46,3099.16 3916.39,3106.24
  region net TFT_LED: 3845.27,3075.41 3836.91,3083.76 3826.96,3072.51 3834.03,3065.44
  region net PB11: 3849.44,3151.97 3857.79,3143.62 3867.76,3154.86 3860.69,3161.94
  region net PB10: 3835.52,3165.89 3843.87,3157.54 3853.86,3168.77 3846.79,3175.84
  region net VCC: 3774.26,3160.3 3800.77,3186.82 3780.92,3190.7 3770.32,3180.07
  region net VCC: 3775.67,3145.01 3767.32,3153.36 3757.36,3142.11 3764.43,3135.04
  region net TFT_SCK: 3671.27,3171.46 3679.62,3179.81 3668.39,3189.79 3661.32,3182.72
  region net TFT_MISO: 3657.35,3157.54 3665.7,3165.89 3654.44,3175.84 3647.37,3168.77
  region net TFT_MOSI: 3643.43,3143.62 3651.78,3151.97 3640.54,3161.94 3633.47,3154.86
  region net T_IRQ: 3587.76,3087.94 3596.11,3096.29 3584.84,3106.24 3577.77,3099.16
  region net T_DO: 3573.83,3074.02 3582.19,3082.37 3570.94,3092.34 3563.87,3085.27
  region net SWDIO: 3608.63,3028.09 3600.28,3019.73 3611.55,3009.78 3618.62,3016.86
  region net VCC: 3561.08,3003.26 3543.4,3020.94 3538.12,3005.01 3545.19,2997.94
  region net SWDCLK: 3540.43,2909.77 3532.08,2918.12 3522.12,2906.87 3529.19,2899.8
  region net U1_44: 3637.86,2812.34 3629.51,2820.69 3619.57,2809.42 3626.64,2802.35
  region net TFT_DC/RS: 3651.78,2798.41 3643.43,2806.77 3633.47,2795.52 3640.54,2788.45
  region net TFT_CS: 3665.7,2784.5 3657.35,2792.85 3647.37,2781.62 3654.44,2774.55
  region net VCC: 3725.56,2805.38 3733.91,2797.02 3739.15,2803.56 3732.08,2810.63
  region net VCC: 3693.54,2756.66 3685.19,2765.01 3675.78,2754.33 3682.85,2747.26
  region net OSCIN: 4294.08,2793.25 4276.31,2775.66 4292.27,2770.36 4299.38,2777.39
  region net OSCIN: 4252.61,2775.66 4235.02,2793.43 4229.72,2777.47 4236.75,2770.36
  region net PC13: 3955.11,2472.3 3930.11,2472.3 3937.61,2487.3 3947.61,2487.3
  region net RESET: 4393.86,2958.09 4431.36,2958.09 4420.11,2948.19 4405.11,2948.19
  region net RESET: 4390.28,2997.69 4390.28,2972.69 4375.28,2980.19 4375.28,2990.19
  region net VCC: 4510.95,3003.94 4510.95,2966.44 4533.45,2977.69 4533.45,2992.69
  region net VCC: 4466.86,3012.3 4504.36,3012.3 4493.11,3034.8 4478.11,3034.8
  region net OSCOUT: 4116.18,2837.3 4120.95,2812.76 4131.67,2836.18 4129.37,2848.02
  region net OSCOUT: 4106,2837.3 4081,2837.3 4071.43,2852.3 4085.58,2852.3
  region net OSCIN: 4000.28,2797.69 4000.28,2822.69 3985.28,2815.19 3985.28,2805.19
  region net OSCIN: 4035.11,2783.09 4010.11,2783.09 4017.61,2768.09 4027.61,2768.09
  region net PB10: 5239.12,3837.69 5239.12,3862.69 5230.61,3855.19 5230.61,3845.19
  region net RESET: 5391.86,2237.36 5429.36,2237.36 5418.11,2259.86 5403.11,2259.86
  region net VBAT: 4426.46,2307.69 4426.46,2282.69 4441.46,2290.19 4441.46,2300.19
  region net VBAT: 4394.31,2309.96 4419.31,2309.96 4411.81,2324.96 4401.81,2324.96
  region net B1_1: 4328.11,2280.43 4303.11,2280.43 4310.61,2265.43 4320.61,2265.43
  region net VBAT: 4419.31,2365.43 4394.31,2365.43 4401.81,2350.43 4411.81,2350.43
  region net VBAT: 4394.31,2394.96 4419.31,2394.96 4411.81,2409.96 4401.81,2409.96
  region net VCC: 4329.94,2365.43 4294.76,2378.42 4282.56,2358.94 4298.05,2353.22
  region net VCC: 4028.92,2167.91 4028.92,2132.47 4051.42,2142.69 4051.42,2157.69
  region net VBAT: 4552.31,2282.69 4552.31,2307.69 4537.31,2300.19 4537.31,2290.19
  region net VCC: 3665.79,2702.95 3690.47,2706.93 3684.31,2721.13 3674.31,2719.52
  region net VCC: 3478.92,3002.69 3478.92,2977.69 3493.92,2985.19 3493.92,2995.19
  region net RESET: 4298.92,2997.69 4298.92,2972.69 4313.92,2980.19 4313.92,2990.19
  region net RESET: 4283.71,2963.62 4258.71,2963.62 4266.21,2948.62 4276.21,2948.62
  region net OSCIN: 4602.31,2747.69 4602.31,2772.69 4587.31,2765.19 4587.31,2755.19
  region net PC15: 4352.31,2647.69 4352.31,2672.69 4337.31,2665.19 4337.31,2655.19
  region net PC14: 4352.31,2567.69 4352.31,2592.69 4337.31,2585.19 4337.31,2575.19
  region net B1_1: 4303.11,1955.47 4328.11,1955.47 4320.61,1970.47 4310.61,1970.47
  region net OSCOUT: 4602.31,2827.69 4602.31,2852.69 4587.31,2845.19 4587.31,2835.19
  region net U1_44: 3573.55,2766.19 3573.55,2784.19 3581.95,2780.19 3581.95,2770.19
  region net T_CS: 3976.36,3002.17 3963.64,2989.44 3960.52,2998.21 3967.6,3005.28
  region net VCC: 4191.61,3393.13 4209.61,3393.13 4208.11,3400.19 4193.11,3400.19
  region net VCC: 4177.59,3435.94 4164.86,3423.22 4171.86,3418.34 4182.47,3428.94
  region net VCC: 4156.61,3427.25 4174.61,3427.25 4173.11,3418.85 4158.11,3418.85
  region net U6_11: 4962.67,3461.19 4962.67,3479.19 4954.27,3475.19 4954.27,3465.19
  region net U6_11: 4147.59,3449.44 4134.86,3462.17 4143.63,3465.28 4150.7,3458.21
  region net SCK: 4015.87,3129.17 4010.27,3146.27 4003.34,3140.44 4006.84,3129.76
  region net MISO: 3940.79,3255.94 3928.06,3243.22 3936.83,3240.1 3943.9,3247.18
  region net MOSI: 3941.61,3172.25 3959.61,3172.25 3955.61,3163.85 3945.61,3163.85
  region net NSS: 4027.67,3061.19 4027.67,3079.19 4019.27,3075.19 4019.27,3065.19
  region net VCC: 3766.61,3267.25 3784.61,3267.25 3783.11,3258.85 3768.11,3258.85
  region net SWDIO: 3516.36,2943.22 3503.64,2955.94 3500.52,2947.18 3507.6,2940.1
  region net SWDIO: 3622.49,3021.78 3614.51,3005.64 3608.63,3012.7 3613.31,3022.17
  region net SWDIO: 3466.61,2798.13 3484.61,2798.13 3480.61,2806.53 3470.61,2806.53
  region net SWDCLK: 3506.61,2798.13 3524.61,2798.13 3520.61,2806.53 3510.61,2806.53
  region net T_DO: 3021.61,2343.13 3039.61,2343.13 3035.61,2351.53 3025.61,2351.53
  region net T_IRQ: 2981.61,2283.13 2999.61,2283.13 2995.61,2291.53 2985.61,2291.53
  region net VCC: 3091.31,3634.79 3073.31,3634.8 3074.81,3643.2 3089.81,3643.19
  region net TFT_CS: 3147.59,3035.94 3134.86,3023.22 3143.63,3020.1 3150.7,3027.18
  region net TFT_DC/RS: 3217.59,3010.94 3204.86,2998.22 3213.63,2995.1 3220.7,3002.18
  region net VCC: 3518.27,2981.19 3518.27,2999.19 3526.67,2995.19 3526.67,2985.19
  region net VCC: 3502.39,2981.19 3502.39,2999.19 3493.99,2995.19 3493.99,2985.19
  region net TFT_LED: 3810.31,3055.95 3826.95,3049.11 3826.83,3058.24 3816.81,3062.36
  region net T_DIN: 3795.37,2943.21 3791.32,2960.75 3800.41,2958.74 3802.66,2948.99
  region net T_CLK: 3818.55,2981.19 3818.55,2999.19 3826.95,2995.19 3826.95,2985.19
  region net OSCOUT: 4454.84,2834.66 4486.14,2803.32 4488.65,2830.06 4481.58,2837.14
  region net OSCOUT: 4427.2,2803.36 4458.54,2834.66 4431.8,2837.17 4424.73,2830.1
  region net SW2_2: 3780.2,3843.62 3741.21,3821.15 3743.49,3846.7 3756.95,3854.46
  region net TFT_RESET: 2454.05,3128.62 2454.05,3181.77 2478.85,3160.19 2478.85,3150.19
  region net TFT_MOSI: 2454.05,2928.62 2454.05,2981.77 2478.85,2960.19 2478.85,2950.19
  region net TFT_SCK: 2407.18,2828.62 2407.18,2881.77 2382.37,2860.19 2382.37,2850.19
  region net TFT_MISO: 2428.39,2690.56 2465.98,2652.97 2468.26,2685.77 2461.19,2692.84
  region net PB11: 5375.17,3581.36 5339.12,3550.82 5339.07,3579.67 5346.72,3586.15
  region net VCC: 5239.18,3552.16 5272.58,3518.76 5245.59,3514.57 5234.99,3525.17
  region net VCC: 4172.19,2058.63 4119.04,2058.63 4138.11,2083.43 4153.11,2083.43
  region net VCC: 4172.19,2058.63 4119.04,2058.63 4138.11,2083.43 4153.11,2083.43
  region net VCC: 3704.91,3438.62 3667.41,3438.62 3678.66,3416.12 3693.66,3416.12
  region net VCC: 3667.41,3381.77 3704.91,3381.77 3693.66,3404.27 3678.66,3404.27
  region net U1_44: 3782.59,2500.94 3769.86,2488.22 3776.86,2483.34 3787.47,2493.94
  region net U1_44: 3769.9,2417.3 3807.4,2417.3 3796.15,2439.8 3781.15,2439.8
  region net U1_20: 3745.81,3584.19 3740.3,3601.33 3732.65,3597.69 3737.47,3582.69
  region net U1_20: 3700.95,3571.44 3700.95,3608.94 3723.45,3597.69 3723.45,3582.69
  region net U1_20: 3831.29,3089.25 3823.02,3097.66 3815.87,3089.28 3822.91,3082.18
  region net U1_20: 3773.01,3076.72 3773.01,3094.72 3781.41,3090.72 3781.41,3080.72
  region net RST: 3989.59,3418.52 3981.14,3434.41 3975.49,3427.14 3980.4,3417.91
  region net R6_2: 3151.11,1929.86 3126.11,1929.86 3133.61,1914.86 3143.61,1914.86
  region net R6_2: 3130.74,1856.56 3146.49,1856.56 3143.61,1871.56 3133.61,1871.56
  region net R5_2: 3072.72,1934.53 3048.16,1929.86 3071.64,1919.05 3083.52,1921.32
  region net R5_2: 3104.74,1856.56 3120.49,1856.56 3117.61,1871.56 3107.61,1871.56
  region net PA10: 3103.51,2045.85 3128.06,2050.53 3104.59,2061.33 3092.7,2059.07
  region net PA10: 3601.67,3101.86 3610.03,3110.21 3598.24,3119.64 3591.17,3112.57
  region net PA9: 3018.51,2045.85 3043.06,2050.53 3019.59,2061.33 3007.7,2059.07
  region net PA9: 3615.59,3115.78 3623.95,3124.13 3613.24,3134.64 3606.17,3127.57
  region net U2_4: 3437.56,2246.77 3462.56,2246.77 3455.06,2261.77 3445.06,2261.77
  region net U2_4: 3440.02,2374.69 3440.02,2354.32 3446.53,2348.62 3450.06,2359.22
  region net PA10: 3188.51,1950.28 3194.91,1974.44 3181.93,1983.99 3178.96,1972.81
  region net PA10: 3157.72,2010.6 3133.16,2005.94 3156.64,1995.13 3168.53,1997.39
  region net VCC: 3218.16,2050.53 3242.72,2045.85 3253.52,2059.07 3241.64,2061.33
  region net VCC: 3723.92,2208.14 3703.57,2193.62 3721.38,2187.9 3729.63,2193.79
  region net +5V: 3094.49,1777.82 3078.74,1777.82 3079.11,1755.32 3094.11,1755.32
  region net +5V: 3333.41,2218.34 3362.69,2241.77 3336.96,2250 3325.18,2240.57
  region net +5V: 3440.02,2456.69 3416.4,2456.69 3394,2434.19 3415.22,2434.19
  region net +5V: 3337.59,2354.44 3324.86,2367.17 3331.86,2372.05 3342.47,2361.44
  region net +5V: 3416.4,2496.06 3440.02,2496.06 3435.71,2517.79 3420.71,2517.79
  region net +5V: 3491.2,2496.06 3514.82,2496.06 3510.51,2507.79 3495.51,2507.79
Bottom Layer:
  region net VCC: 3959.26,3360.29 3950.91,3351.94 3947.48,3356.66 3954.55,3363.73
  region net VCC: 3979.23,3340.33 3961.55,3358.01 3976.58,3362.43 3983.65,3355.36
  region net VCC: 3973.18,3374.22 3964.83,3365.87 3954.84,3377.09 3961.91,3384.16
  region net VCC: 3967.12,3363.57 3984.79,3345.9 3969.75,3341.46 3962.68,3348.53
  region net RST: 4014.94,3415.98 4006.58,3407.62 3996.64,3418.89 4003.71,3425.96
  region net U6_11: 4134.64,3407.63 4126.29,3415.98 4132.08,3420.53 4139.15,3413.46
  region net VCC: 4148.56,3393.71 4140.21,3402.06 4151.45,3412.03 4158.52,3404.96
  region net U6_13: 4162.47,3379.79 4154.12,3388.14 4165.4,3398.07 4172.48,3391
  region net U6_16: 4204.23,3338.03 4195.89,3346.38 4207.11,3356.36 4214.18,3349.29
  region net U6_17: 4204.23,3282.36 4181.96,3304.63 4203.71,3314.7 4214.32,3304.09
  region net U6_21: 4140.21,3218.33 4148.56,3226.68 4158.53,3215.44 4151.46,3208.37
  region net U6_22: 4126.29,3204.41 4134.64,3212.76 4144.58,3201.49 4137.51,3194.42
  region net NSS: 4082.67,3192.35 4098.45,3176.57 4096.51,3157.29 4086.51,3167.29
  region net SCK: 3978.75,3240.6 3987.1,3232.25 3979.15,3225.56 3972.08,3232.63
  region net MOSI: 3964.83,3254.52 3973.18,3246.17 3961.91,3236.22 3954.84,3243.29
  region net MISO: 3950.91,3268.44 3959.26,3260.09 3949.55,3251.66 3942.48,3258.73
  region net VCC: 3952.81,3298.18 3936.99,3282.36 3917.91,3284.5 3927.85,3294.44
  region net U6_17: 5029.39,3312.2 5051.11,3312.2 5043.61,3327.2 5033.61,3327.2
  region net C16_2: 4984.62,3278.19 4970.08,3298.52 4964.37,3280.72 4970.26,3272.47
  region net U6_16: 4940.28,3367.76 4945.05,3392.3 4931.85,3403.02 4929.55,3391.18
  region net U6_17: 5060.95,3346.44 5060.95,3383.94 5083.45,3372.69 5083.45,3357.69
  region net U6_17: 5026.11,3338.09 5051.11,3338.09 5043.61,3323.09 5033.61,3323.09
  region net C9_1: 5453.05,3184.86 5428.51,3189.63 5427.08,3185.73 5436.53,3181.04
  region net U6_13: 5443.11,3305.53 5468.11,3305.53 5460.61,3320.53 5450.61,3320.53
  region net C19_2: 5658.11,3184.86 5677.72,3184.86 5675.61,3169.86 5665.61,3169.86
  region net U6_11: 5623.51,3300.75 5648.05,3305.53 5624.62,3316.25 5612.78,3313.95
  region net C19_2: 5617.19,2983.26 5617.19,3008.26 5632.19,3000.74 5632.19,2990.74
  region net U6_21: 4578.71,3046.77 4603.71,3046.77 4596.21,3061.77 4586.21,3061.77
  region net U6_22: 4317.65,3046.77 4342.65,3046.77 4335.23,3061.77 4325.23,3061.77
  region net C16_2: 4967.51,3251.77 4942.51,3251.77 4950.01,3264.29 4960.01,3264.29
  region net U6_16: 4518.92,3397.69 4518.92,3422.69 4533.92,3415.19 4533.92,3405.19
  region net U6_16: 4503.71,3436.77 4478.71,3436.77 4486.21,3444.59 4496.21,3444.59
  region net C9_1: 5484.03,3008.26 5484.03,2983.26 5469.03,2990.74 5469.03,3000.74
  region net C19_2: 5644.03,2983.23 5644.03,3008.23 5629.03,3000.74 5629.03,2990.74
  region net C19_2: 5658.11,3023.5 5683.11,3023.5 5675.61,3038.5 5665.61,3038.5
  region net C9_1: 5457.19,3008.23 5457.19,2983.23 5472.19,2990.74 5472.19,3000.74
  region net C9_1: 5418.11,3023.5 5443.11,3023.5 5435.61,3038.5 5425.61,3038.5
  region net T_IRQ: 2461.82,2190.62 2466.04,2165.98 2477.19,2189.7 2475.12,2201.77
  region net T_CS: 3967.67,2981.19 3967.67,2999.19 3959.27,2995.19 3959.27,2985.19
  region net VCC: 4191.61,3377.25 4209.61,3377.25 4208.11,3370.59 4193.11,3370.59
  region net VCC: 4156.61,3443.13 4174.61,3443.13 4170.61,3451.53 4160.61,3451.53
  region net VCC: 4156.61,3427.25 4174.61,3427.25 4170.61,3419.09 4160.61,3419.09
  region net U6_11: 4978.55,3461.19 4978.55,3479.19 4986.95,3475.19 4986.95,3465.19
  region net U6_11: 4126.61,3442.25 4144.61,3442.25 4140.61,3433.85 4130.61,3433.85
  region net SCK: 4011.61,3148.13 4029.61,3148.13 4025.61,3156.53 4015.61,3156.53
  region net MISO: 3945.97,3249.13 3940.33,3266.22 3949.37,3265.63 3952.88,3254.99
  region net MOSI: 3944.47,3190.5 3961.61,3184.99 3960.61,3194.14 3950.61,3197.35
  region net NSS: 4047.59,3069.44 4034.86,3082.17 4043.63,3085.28 4050.7,3078.21
  region net RST: 4004.34,3430.97 3991.64,3418.21 4000.41,3415.12 4007.47,3422.2
  region net VCC: 3766.61,3283.13 3784.61,3283.13 3780.61,3291.53 3770.61,3291.53
  region net VCC: 3787.05,3271.56 3777.79,3286.99 3787.05,3287.88 3792.19,3279.31
  region net SWDIO: 3523.55,2946.19 3523.55,2964.19 3531.95,2960.19 3531.95,2950.19
  region net SWDIO: 3626.36,2998.22 3613.64,3010.94 3610.52,3002.18 3617.6,2995.1
  region net SWDIO: 3466.61,2782.25 3484.61,2782.25 3480.61,2773.85 3470.61,2773.85
  region net SWDCLK: 3506.61,2782.25 3524.61,2782.25 3520.61,2773.85 3510.61,2773.85
  region net T_DO: 3022.67,2326.19 3022.67,2344.19 3014.27,2340.19 3014.27,2330.19
  region net T_IRQ: 2982.67,2266.19 2982.67,2284.19 2974.27,2280.19 2974.27,2270.19
  region net VCC: 3090.25,3617.88 3090.22,3635.88 3098.63,3631.89 3098.65,3621.89
  region net TFT_CS: 3136.36,3047.17 3123.64,3034.44 3120.52,3043.21 3127.6,3050.28
  region net TFT_DC/RS: 3197.67,3001.19 3197.67,3019.19 3189.27,3015.19 3189.27,3005.19
  region net VCC: 3519.33,2998.13 3501.33,2998.12 3505.32,3006.53 3515.32,3006.53
  region net TFT_LED: 3807.67,3036.19 3807.67,3054.19 3799.27,3050.19 3799.27,3040.19
  region net T_DIN: 3786.36,2938.22 3773.64,2950.94 3770.52,2942.18 3777.6,2935.1
  region net T_CLK: 3802.67,2981.19 3802.67,2999.19 3794.27,2995.19 3794.27,2985.19
  region net TFT_CS: 2454.05,3228.62 2454.05,3281.77 2478.85,3260.19 2478.85,3250.19
  region net TFT_DC/RS: 2428.39,3019.83 2465.98,3057.41 2468.26,3024.62 2461.19,3017.55
  region net TFT_LED: 2454.05,2728.62 2454.05,2781.77 2478.85,2760.19 2478.85,2750.19
  region net T_CLK: 2461.4,2537.65 2444.17,2587.93 2474.44,2576.09 2478.05,2565.56
  region net T_CS: 2425,2490.18 2396.6,2445.25 2387.1,2476.64 2392.57,2485.3
  region net T_DIN: 2428.39,2390.56 2465.98,2352.97 2468.26,2385.77 2461.19,2392.84
  region net T_DO: 2428.39,2290.56 2465.98,2252.97 2468.26,2285.77 2461.19,2292.84
  region net SWDIO: 4072.19,2011.76 4019.04,2011.76 4040.61,1995.19 4050.61,1995.19
  region net SWDCLK: 3949.05,1999.93 3910.19,2036.19 3909.04,2003.34 3916.35,1996.51
  region net U6_22: 4322.72,3207.18 4356.1,3173.76 4327.65,3171.65 4320.58,3178.73
  region net U6_21: 4515.64,3203.24 4549.06,3236.62 4520.31,3239.07 4513.23,3232
  region net U6_21: 4544.38,3173.81 4578.54,3206.44 4580.31,3177.64 4573.07,3170.73
  region net U1_44: 3761.61,2508.13 3779.61,2508.13 3778.11,2516.53 3763.11,2516.53
  region net U1_44: 3577.59,2775.94 3564.86,2763.22 3571.86,2758.34 3582.47,2768.94
  region net U1_20: 3765.82,3097.69 3753.09,3084.97 3749.98,3093.73 3757.05,3100.8
  region net U1_20: 3741.61,3587.25 3759.61,3587.25 3755.61,3578.85 3745.61,3578.85
  region net +5V: 3506.36,1742.17 3493.64,1729.44 3488.76,1736.44 3499.36,1747.05
  region net +5V: 3317.67,2346.19 3317.67,2364.19 3309.27,2362.69 3309.27,2347.69

## Silkscreen, mask and mechanical layers (free items; w line width, h text height)
Top Overlay:
  text "3.7v铝电池接口" at 3330.61,3640.19 h80
  text "ESP8266" at 5160.61,3405.19 h80
  text "上电指示灯" at 2955.61,3310.19 h80
  text "后备电源" at 4485.61,2385.19 h80
  text "LED灯" at 4045.61,2345.19 h80
  text "复位按键" at 5255.61,2255.19 h80
  text "烧录口" at 3520.61,1910.19 h80 r359
  text "USB供电口" at 2580.61,1905.19 h80 r1

## Text inside footprints (layer, text, board x,y; h text height)
U7: Top Overlay "-" at 3495.61,3955.19 h80 r180; Top Overlay "+" at 3767.33,3933.48 h80 r225